# EAGLE board Slave_Micro_Circuit (EAGLE 9.6.2)
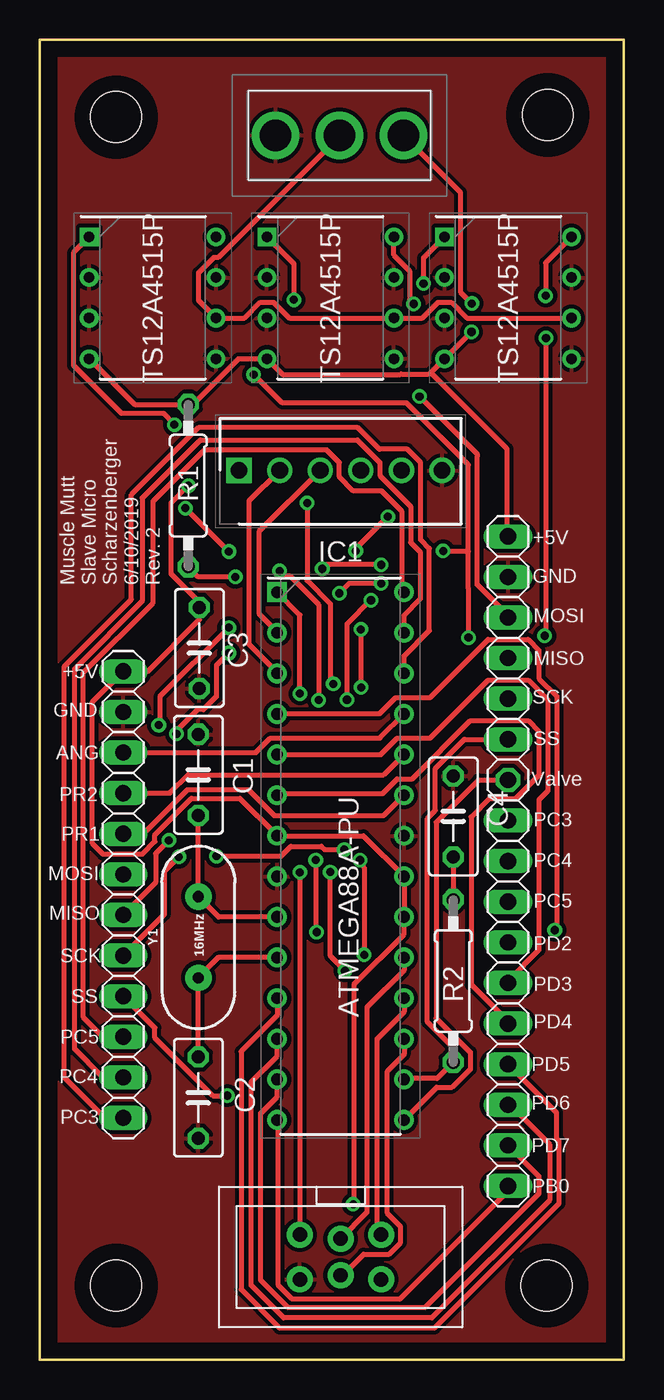
[diagram p0: board, top side]
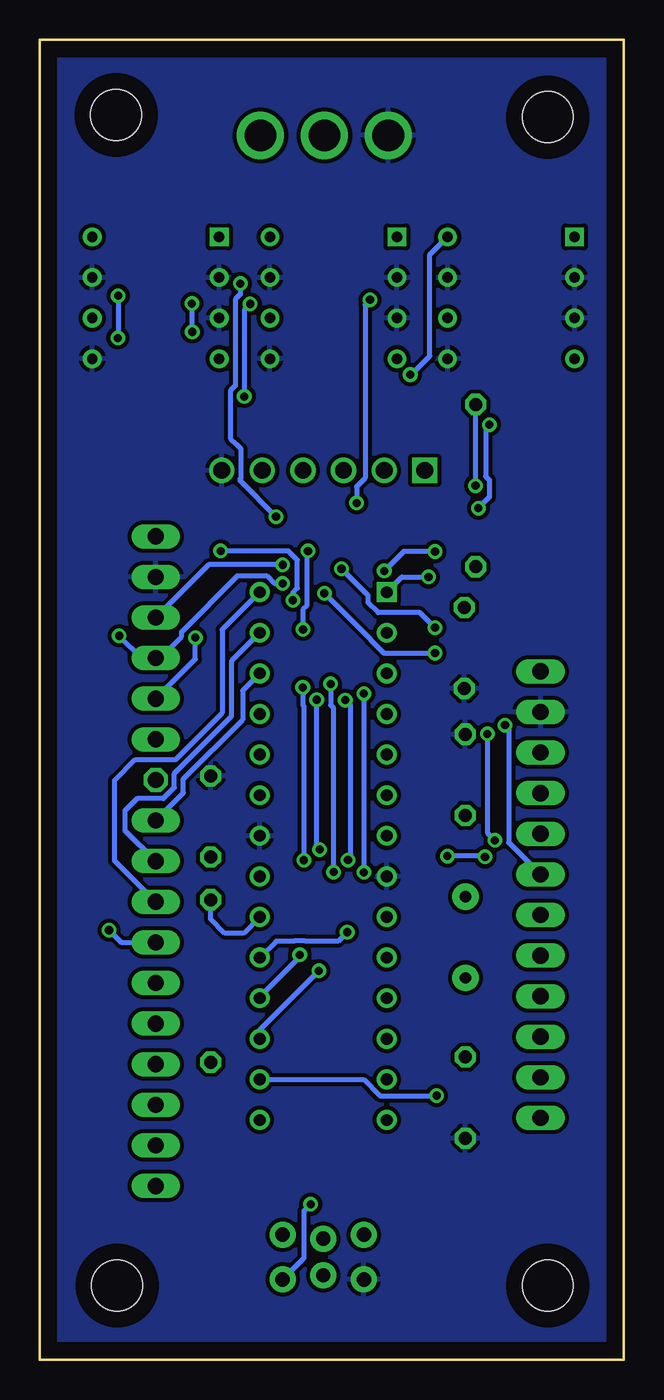
[diagram p1: board, bottom side, seen from below]

Size 36.51 x 82.55 mm. Coordinates in mm from the lower left corner, seen from the top.
Outline: 0,0 36.51,0 36.51,82.55 0,82.55 0,0
Copper layers (1*16): Top 0.035mm / dielectric 1.5mm / Bottom 0.035mm
Design rules "default": minimum track width 6mil, minimum drill 0.35mm, track to track 6mil, track to pad 6mil, pad to pad 6mil, via to via 6mil, smd to smd 6mil, copper to edge 40mil, drill to drill 6mil, minimum pad ring 10mil, minimum via ring 8mil, stop-mask expansion 4mil, vias tented up to drill 0mil, thermal gap 10mil
Net classes: 0 default: width 0.305 mm, drill 0.508 mm, clearance 0.254 mm
Holes 3.17 mm at 4.76,77.72 31.75,77.85 31.69,4.64 4.76,4.64

## Footprints (pad centres in the part's own frame; a part is rotated, then mirrored left to right if it is on the bottom)
C050-030X075 = drill 0.813 octagon: 1 -2.54,0; 2 2.54,0
DIP794W53P254L3467H457Q28N = drill 0.733 pad 1.133 square: 1 -3.969,16.51 | drill 0.733 pad 1.133: 2 -3.969,13.97; 3 -3.969,11.43; 4 -3.969,8.89; 5 -3.969,6.35; 6 -3.969,3.81; 7 -3.969,1.27; 8 -3.969,-1.27; 9 -3.969,-3.81; 10 -3.969,-6.35; 11 -3.969,-8.89; 12 -3.969,-11.43; 13 -3.969,-13.97; 14 -3.969,-16.51; 15 3.969,-16.51; 16 3.969,-13.97; 17 3.969,-11.43; 18 3.969,-8.89; 19 3.969,-6.35; 20 3.969,-3.81; 21 3.969,-1.27; 22 3.969,1.27; 23 3.969,3.81; 24 3.969,6.35; 25 3.969,8.89; 26 3.969,11.43; 27 3.969,13.97; 28 3.969,16.51
DIP794W46P254L959H508Q8N = drill 0.655 pad 1.055 square: 1 -3.97,3.81 | drill 0.655 pad 1.055: 2 -3.97,1.27; 3 -3.97,-1.27; 4 -3.97,-3.81; 5 3.97,-3.81; 6 3.97,-1.27; 7 3.97,1.27; 8 3.97,3.81
AVRISP-BOX = drill 0.9 pad 1.626: 1 -1.397,2.54; 2 1.397,2.54; 3 -1.143,0; 4 1.143,0; 5 -1.397,-2.54; 6 1.397,-2.54
SHDR6W87P0X254_1X6_1509X635X10 = drill 1.05 pad 1.575 square: 1 0,0 | drill 1.05 pad 1.575: 2 2.54,0; 3 5.08,0; 4 7.62,0; 5 10.16,0; 6 12.7,0
1X02 = drill 1.016 long: 1 -1.27,0; 2 1.27,0
1X04 = drill 1.016 long: 1 -3.81,0; 2 -1.27,0; 3 1.27,0; 4 3.81,0
1X10 = drill 1.016 long: 1 -11.43,0; 2 -8.89,0; 3 -6.35,0; 4 -3.81,0; 5 -1.27,0; 6 1.27,0; 7 3.81,0; 8 6.35,0; 9 8.89,0; 10 11.43,0
1X03 = drill 1.016 long: 1 -2.54,0; 2 0,0; 3 2.54,0
1X01 = drill 1.016 octagon: 1 0,0
0207/10 = drill 0.813 octagon: 1 -5.08,0; 2 5.08,0
1031211PEV = drill 1.972 pad 2.958: 1 0,0; 2 4,0; 3 8,0
HC49US = drill 0.7 pad 1.651: 1 -2.54,0; 2 2.54,0

## Placement (x,y rotation side)
C1  [C050-030X075]  9.91,36.58 90 top
C2  [C050-030X075]  9.91,16.38 270 top
C3  [C050-030X075]  9.97,44.51 270 top
C4  [C050-030X075]  25.84,33.97 90 top
IC1  ATMEGA88A-PU  [DIP794W53P254L3467H457Q28N]  18.8,31.5 0 top
IC2  TS12A4515P  [DIP794W46P254L959H508Q8N]  7.05,66.42 0 top
IC3  TS12A4515P  [DIP794W46P254L959H508Q8N]  18.16,66.42 0 top
IC4  TS12A4515P  [DIP794W46P254L959H508Q8N]  29.27,66.42 0 top
ISP1  AVRISP-BOX  [AVRISP-BOX]  18.8,6.41 270 top
J1  22-23-2061  [SHDR6W87P0X254_1X6_1509X635X10]  12.45,55.63 0 top
JP1  [1X02]  5.21,41.78 90 top
JP2  [1X02]  29.27,50.23 90 top
JP3  [1X04]  5.21,26.54 270 top
JP4  [1X04]  29.27,42.61 270 top
JP5  [1X10]  29.27,22.29 270 top
JP6  [1X03]  5.21,35.43 90 top
JP7  [1X01]  29.27,36.26 0 top
JP8  [1X03]  5.21,17.65 90 top
R1  [0207/10]  9.27,54.67 270 top
R2  [0207/10]  25.84,23.69 270 top
S1  103-1211P-EV  [1031211PEV]  14.73,76.58 0 top
Y1  16MHz  [HC49US]  9.91,26.42 90 top

## Library data of the parts
C1-C4 ISP1 = adafruit
IC1 = SamacSys_Parts; DESCRIPTION: ATMEGA88A-PU, 8 bit AVR Microcontroller 20MHz 512 B, 8 kB Flash, 1 kB RAM, I2C 28-Pin PDIP; HEIGHT: 4.572mm; MANUFACTURER_NAME: Microchip; MANUFACTURER_PART_NUMBER: ATMEGA88A-PU; MOUSER_PART_NUMBER: 556-ATMEGA88A-PU
IC2-IC4 = SamacSys_Parts; DESCRIPTION: Low-Voltage, Low On-State Resistance SPST CMOS Analog Switches; HEIGHT: 5.08mm; MANUFACTURER_NAME: Texas Instruments; MANUFACTURER_PART_NUMBER: TS12A4515P
J1 = SamacSys_Parts; DESCRIPTION: 2.54mm,header,KK,vert,Sn,frictn lock,6w Molex KK 254 Series, Series Number 6373, 2.54mm Pitch 6 Way 1 Row Straight PCB Header, Through Hole, Solder Termination; HEIGHT: 10.67mm; MANUFACTURER_NAME: Molex; MANUFACTURER_PART_NUMBER: 22-23-2061; MOUSER_PART_NUMBER: 538-22-23-2061
JP1-JP8 = pinhead
R1 R2 = rcl; SPICEPREFIX: R
S1 = SamacSys_Parts; DESCRIPTION: Slide Switches SPDT 0.5A 50VDC; HEIGHT: 11mm; MANUFACTURER_NAME: Mountain Switch; MANUFACTURER_PART_NUMBER: 103-1211P-EV; MOUSER_PART_NUMBER: 103-1211P-EV; MOUSER_PRICE-STOCK: https://www.mouser.com/Search/Refine.aspx?Keyword=103-1211P-EV
Y1 = SparkFun-Clocks; PROD_ID: XTAL-08181; SF_ID: COM-00536

## Nets
+5V: C3.1 C4.1 IC1.7 IC1.20 IC1.21 IC2.4 IC3.4 IC4.4 ISP1.2 JP1.2 JP2.2 R1.1 R2.1 S1.3
GND: C1.2 C2.2 C3.2 C4.2 IC1.8 IC1.22 IC2.2 IC2.3 IC2.5 IC2.7 IC3.2 IC3.3 IC3.5 IC3.7 IC4.2 IC4.3 IC4.5 IC4.7 ISP1.6 J1.6 JP1.1 JP2.1 S1.1
MISO: IC1.18 IC4.1 ISP1.1
MISO_OUT: IC4.8 JP3.2 JP4.2
MOSI: IC1.17 IC3.1 ISP1.4
MOSI_OUT: IC3.8 JP3.1 JP4.1
N$1: IC2.6 IC3.6 IC4.6 S1.2
N$543: C2.1 IC1.10 Y1.1
N$546: C1.1 IC1.9 Y1.2
PB0: IC1.14 JP5.10
PC3: IC1.26 JP5.1 JP8.1
PC4: IC1.27 JP5.2 JP8.2
PC5: IC1.28 JP5.3 JP8.3
PD2: IC1.4 JP5.4
PD3: IC1.5 JP5.5
PD4: IC1.6 JP5.6
PD5: IC1.11 JP5.7
PD6: IC1.12 JP5.8
PD7: IC1.13 JP5.9
PRESSURE1: IC1.23 JP6.1
PRESSURE2: IC1.24 JP6.2
PWM: IC1.15 JP7.1
RESET: IC1.1 ISP1.5 R1.2
RX: IC1.2 J1.3
SCK: IC1.19 IC2.1 ISP1.3
SCK_OUT: IC2.8 JP3.3 JP4.3
SS: IC1.16 JP3.4 JP4.4 R2.2
THETA: IC1.25 JP6.3
TX: IC1.3 J1.2

## Tracks (layer width: path | path; a pad name or v marks a point on that pad's centre or on a via)
+5V  (via drill 0.51)
  Top 0.305: C4.1 R2.1 | IC2.4 5.94,59.75 R1.1 9.56,59.75 12.42,62.61 IC3.4 15.18,61.62 22.54,61.62 22.58,61.66 24.35,61.66 24.43,61.74 | 24.43,61.74 IC4.4 v26.98,64.29 v26.99,64.29 | S1.3 26.29,73.02 26.29,66.78 v27.01,66.06 | v9.28,54.67 8.2,53.59 8.2,49.15 9.97,47.39 C3.1 9.97,46.29 6.73,43.05 JP1.2 3.28,41.12 3.28,32.28 3.94,31.62 6.41,31.62 7.19,32.4 7.19,32.83 9.46,35.1 12.51,35.1 14.83,32.78 IC1.7 20.23,32.77 IC1.21 IC1.20 22.77,26.6 19.63,23.47 19.63,9.77 v19.58,9.72 | JP2.2 29.2,51.58 29.2,56.97 24.43,61.74
  Bottom 0.305: IC1.20 23.78,26.67 24.96,26.67 25.84,27.56 R2.1 | v9.28,54.67 v9.27,54.67 R1.1 | v19.58,9.72 v19.59,9.72 20.02,9.29 20.02,6.34 ISP1.2 | v26.99,64.29 26.99,66.04 v27.01,66.06
GND
  pour Top: -1.27,84.14 -1.27,-1.27 38.16,-1.27 38.16,84.14
  pour Bottom: -1.27,84.14 -1.27,-1.27 38.16,-1.27 38.16,84.14
MISO  (via drill 0.51)
  Top 0.305: ISP1.1 21.08,8.06 21.08,20.07 22.77,21.75 IC1.18 | IC4.1 24.37,69.3 24.23,69.16 23.98,68.91 v23.98,67.31 | v21.75,52.73 19.75,50.72 v19.75,50.58 | v20.07,45.68 20.07,42.06 v20.08,42.05 | v20.01,31.23 20.01,31.04 20.27,30.78 v20.27,25.32
  Bottom 0.305: v21.75,52.73 24,54.98 24,55.08 23.95,55.13 23.95,56.97 23.97,56.99 24.23,57.25 24.6,57.62 24.6,60.61 24.3,60.91 24.3,66.33 23.98,66.65 v23.98,67.31 | v20.07,45.68 20.07,46.91 19.84,47.14 19.84,50.49 v19.75,50.58 | v20.08,42.05 20.01,41.98 20.01,41.69 20.07,41.63 20.07,40.92 20.01,40.86 v20.01,31.23 | IC1.18 22.8,22.64 22.8,22.67 20.27,25.2 v20.27,25.32
MISO_OUT  (via drill 0.51)
  Top 0.305: v31.62,66.55 31.62,68.61 IC4.8 | v31.56,45.28 31.62,45.34 31.62,63.88 v31.64,63.91 | v21.34,48.55 19.34,48.55 v18.73,47.94 | v11.81,44.2 11.04,43.42 11.04,41.47 10.22,40.65 9.87,40.65 8.53,39.32 v8.53,39.14 | v8.06,32.48 7.24,31.66 7.24,29.84 JP3.2
  Bottom 0.305: v31.56,45.28 30.16,43.88 JP4.2 29.02,43.88 27.66,45.24 27.66,45.52 24.15,49.03 22.34,49.03 21.86,48.55 v21.34,48.55 | v31.62,66.55 31.62,63.93 v31.64,63.91 | v18.73,47.94 15.85,45.06 15.85,45.04 15.01,44.2 v11.81,44.2 | v8.53,39.14 8.53,32.95 v8.06,32.48
MOSI  (via drill 0.51)
  Top 0.305: ISP1.4 18.92,5.27 20.24,6.59 21.84,6.59 22.55,7.3 22.55,8.32 21.72,9.15 21.72,18.03 22.77,19.08 IC1.17 | IC3.1 15.88,68.55 v15.88,66.29 | v16.71,53.59 16.71,48.73 18.16,47.28 18.16,42.44 v18.34,42.27 | v19.07,24.32 18.16,25.23 18.16,30.48 v18.15,30.49
  Bottom 0.305: v16.71,53.59 16.71,54.6 16.18,55.13 16.18,65.99 v15.88,66.29 | v18.34,42.27 18.34,40.94 18.15,40.75 v18.15,30.49 | v19.07,24.32 22.77,20.63 IC1.17
MOSI_OUT  (via drill 0.51)
  Top 0.305: JP4.1 29.27,46.54 27.34,48.48 27.34,55.56 27.34,56.48 27.34,56.64 v23.74,60.25 | IC3.8 22.13,69.09 23.12,68.1 23.12,66.29 v23.37,66.04 | v11.81,45.78 11.81,45.77 7.51,41.46 7.51,39.76 v7.43,39.69 | v21.34,49.72 17.91,49.72 v17.65,49.47
  Bottom 0.305: v7.43,39.69 7.2,39.46 7.2,32.35 JP3.1 | v11.81,45.78 12.75,46.73 15.36,46.73 16,47.37 16,47.82 v17.65,49.47 | JP4.1 25.97,49.72 v21.34,49.72 | v23.37,66.04 23.74,65.67 v23.74,60.25
N$1
  Top 0.305: IC4.6 26.7,65.15 25.71,66.14 24.89,66.14 23.91,65.15 IC3.6 15.59,65.15 14.6,66.14 13.78,66.14 12.79,65.15 IC2.6 9.91,66.26 9.91,67.98 10.86,68.93 11.15,68.93 18.73,76.52 S1.2
N$543
  Top 0.305: IC1.10 11.14,25.15 9.91,23.91 Y1.1 C2.1
N$546
  Top 0.305: IC1.9 11.18,27.69 Y1.2 C1.1
PB0
  Top 0.305: IC1.14 14.91,14.9 14.91,4.64 15.75,3.8 22.53,3.8 29.27,10.54 JP5.10
PC3
  Top 0.305: IC1.26 22.77,44.01 24.35,45.6 24.35,50.73 23.8,51.28 23.8,56.12 22.97,56.95 21.22,56.95 19.88,58.29 9.91,58.29 5.71,54.1 5.71,47.56 1.52,43.37 1.52,17.65 4.06,15.11 JP8.1
  Bottom 0.305: IC1.26 23.84,41.85 23.84,40.02 27.55,36.32 27.55,35.45 JP5.1
PC4
  Top 0.305: IC1.27 22.77,46.55 23.79,47.58 23.79,50.5 23.18,51.12 23.18,53.37 21.41,55.13 21.41,55.16 21.26,55.31 21.26,56.12 19.85,57.53 10.03,57.53 6.39,53.89 6.39,47.44 2.16,43.21 2.16,19.43 3.94,17.65 JP8.2
  Bottom 0.305: JP5.2 31.2,33.11 31.2,34.33 30.44,35.09 28.79,35.09 28.11,35.77 28.11,36.67 24.54,40.23 24.54,43.69 IC1.27
PC5
  Top 0.305: JP8.3 3.94,20.19 2.72,21.41 2.72,42.98 7.08,47.34 7.08,53.69 10.29,56.9 17.94,56.9 18.72,56.12 18.72,55.23 19.61,54.34 21.36,54.34 22.62,53.09 22.62,48.15 IC1.28
  Bottom 0.305: JP5.3 31.84,31.2 31.84,36.23 30.54,37.53 28.04,37.53 25.11,40.45 25.11,45.66 IC1.28
PD2  (via drill 0.51)
  Top 0.305: IC1.4 21.21,40.39 22.24,41.41 24.39,41.41 28.03,45.05 30.52,45.05 31.2,44.36 31.2,42.61 32.32,41.49 32.32,26.99 v32.19,26.86
  Bottom 0.305: v32.19,26.86 31.43,26.1 JP5.4
PD3
  Top 0.305: IC1.5 21.31,37.85 22.34,38.87 24.39,38.87 28.03,42.51 30.52,42.51 31.76,41.26 31.76,35.57 31.2,35.01 31.2,25.61 29.27,23.68 JP5.5
PD4
  Top 0.305: IC1.6 14.9,35.38 21.39,35.38 22.34,36.33 23.29,36.33 26.92,39.97 30.52,39.97 31.2,39.28 31.2,36.54 29.76,35.09 28.11,35.09 26.96,33.95 26.96,23.46 29.27,21.14 JP5.6
PD5
  Top 0.305: JP5.7 32.29,15.46 32.29,13.84 32.45,13.68 32.45,9.75 24.67,1.97 14.99,1.97 12.57,4.38 12.57,19.26 14.83,21.52 IC1.11
PD6
  Top 0.305: JP5.8 29.4,15.94 31.88,13.46 31.88,9.97 24.51,2.6 15.24,2.6 13.21,4.64 13.21,17.36 14.83,18.98 IC1.12
PD7
  Top 0.305: IC1.13 14.83,16.44 13.79,15.4 13.79,4.97 15.52,3.24 24.07,3.24 31.2,10.38 31.2,11.47 JP5.9
PRESSURE1
  Top 0.305: JP6.1 5.24,32.92 6.5,32.92 9.23,35.66 13.02,35.66 14.64,34.04 21.5,34.04 IC1.23
PRESSURE2
  Top 0.305: IC1.24 21.5,36.58 9.27,36.58 8.13,35.43 JP6.2
PWM
  Top 0.305: IC1.15 24.81,17.03 25.78,17.03 26.91,18.16 26.91,19.22 24.78,21.35 24.78,33.6 27.43,36.26 JP7.1
RESET  (via drill 0.51)
  Top 0.305: IC1.1 16.26,46.58 v16.26,41.66 | v16.26,30.48 ISP1.5 | v12.22,48.96 9.91,48.96 R1.2
  Bottom 0.305: v16.26,41.66 v16.26,30.48 | IC1.1 13.87,48.96 v12.22,48.96
RX
  Top 0.305: IC1.2 14.83,45.51 13.72,46.62 13.72,51.82 J1.3
SCK  (via drill 0.51)
  Top 0.305: ISP1.3 20.45,9.21 20.45,22.04 22.77,24.35 IC1.19 | IC2.1 2.09,69.24 2.09,62.2 5.1,59.2 7.73,59.2 8.41,58.52 v8.41,58.48 | v9.1,53.26 v11.81,50.55 | v14.99,49.34 15.29,49.03 15.62,49.03 17.42,47.22 v17.42,41.25 | v17.25,31.24 17.25,26.78 v17.3,26.73
  Bottom 0.305: v8.41,58.48 8.64,58.26 8.64,55.25 8.41,55.02 8.41,53.94 v9.1,53.26 | v11.81,50.55 13.78,50.55 v14.99,49.34 | v17.42,41.25 17.11,40.93 17.11,31.38 v17.25,31.24 | IC1.19 21.75,26.16 20.65,26.16 20.63,26.19 19.91,26.19 19.89,26.16 17.87,26.16 v17.3,26.73
SCK_OUT  (via drill 0.51)
  Top 0.305: v26.8,45.16 26.8,48.23 26.78,48.24 26.78,50.55 | 26.78,50.55 26.78,55.98 22.92,59.84 15.15,59.84 13.38,61.62 v13.36,61.62 | JP3.3 7.8,27.86 7.8,30.56 v8.68,31.45 | v11.04,31.5 11.05,31.48 15.06,31.48 15.68,32.11 17.6,32.11 17.81,31.9 v19.02,31.9 | v25.21,50.58 26.75,50.58 26.78,50.55 | v19.2,41.27 19.2,46.04 20.66,47.5 v20.7,47.5
  Bottom 0.305: JP4.3 26.8,43.82 v26.8,45.16 | v13.36,61.62 13.28,61.62 12.12,62.77 12.12,69.13 IC2.8 | v8.68,31.45 8.73,31.5 v11.04,31.5 | v19.02,31.9 19.2,32.08 v19.2,41.27 | v25.21,50.58 20.98,50.58 20.41,50.02 20.41,48.26 20.7,47.97 v20.7,47.5
SS  (via drill 0.51)
  Top 0.305: IC1.16 22.83,17.59 24.83,17.59 R2.2 25.84,19.49 24.22,21.12 24.22,33.84 24.73,34.35 24.73,36.99 26.54,38.8 JP4.4 | JP3.4 7.19,20.75 7.19,20.13 10.81,16.51 v11.71,16.51
  Bottom 0.305: IC1.16 16.28,17.53 15.25,16.5 11.72,16.5 v11.71,16.51
THETA
  Top 0.305: IC1.25 21.25,38.87 14.4,38.87 13.5,37.97 JP6.3
TX
  Top 0.305: IC1.3 14.83,42.99 13.08,44.74 13.08,53.72 J1.2

## Text on the board
tPlace: +5V | GND | Muscle Mutt / Slave Micro / Scharzenberger / 6/10/2019 / Rev. 2 | MOSI | MISO | +5V | GND | SCK | SS | ANG | Valve | PR2 | PC3 | PR1 | PC4 | MOSI | PC5 | MISO | PD2 | SCK | SS | PD3 | PD4 | PC5 | PC4 | PD5 | PD6 | PC3 | PD7 | PB0